# Altium PCB PCB_ledRYG.PcbDoc
Units mm, origin at the board's own origin, x right, y up, seen from the top; angles counter-clockwise.
Board outline 71.12 x 60.96 mm, 2 copper layers (Top Layer, Bottom Layer); 18 components, 12 nets, 36 pads, 0 vias.
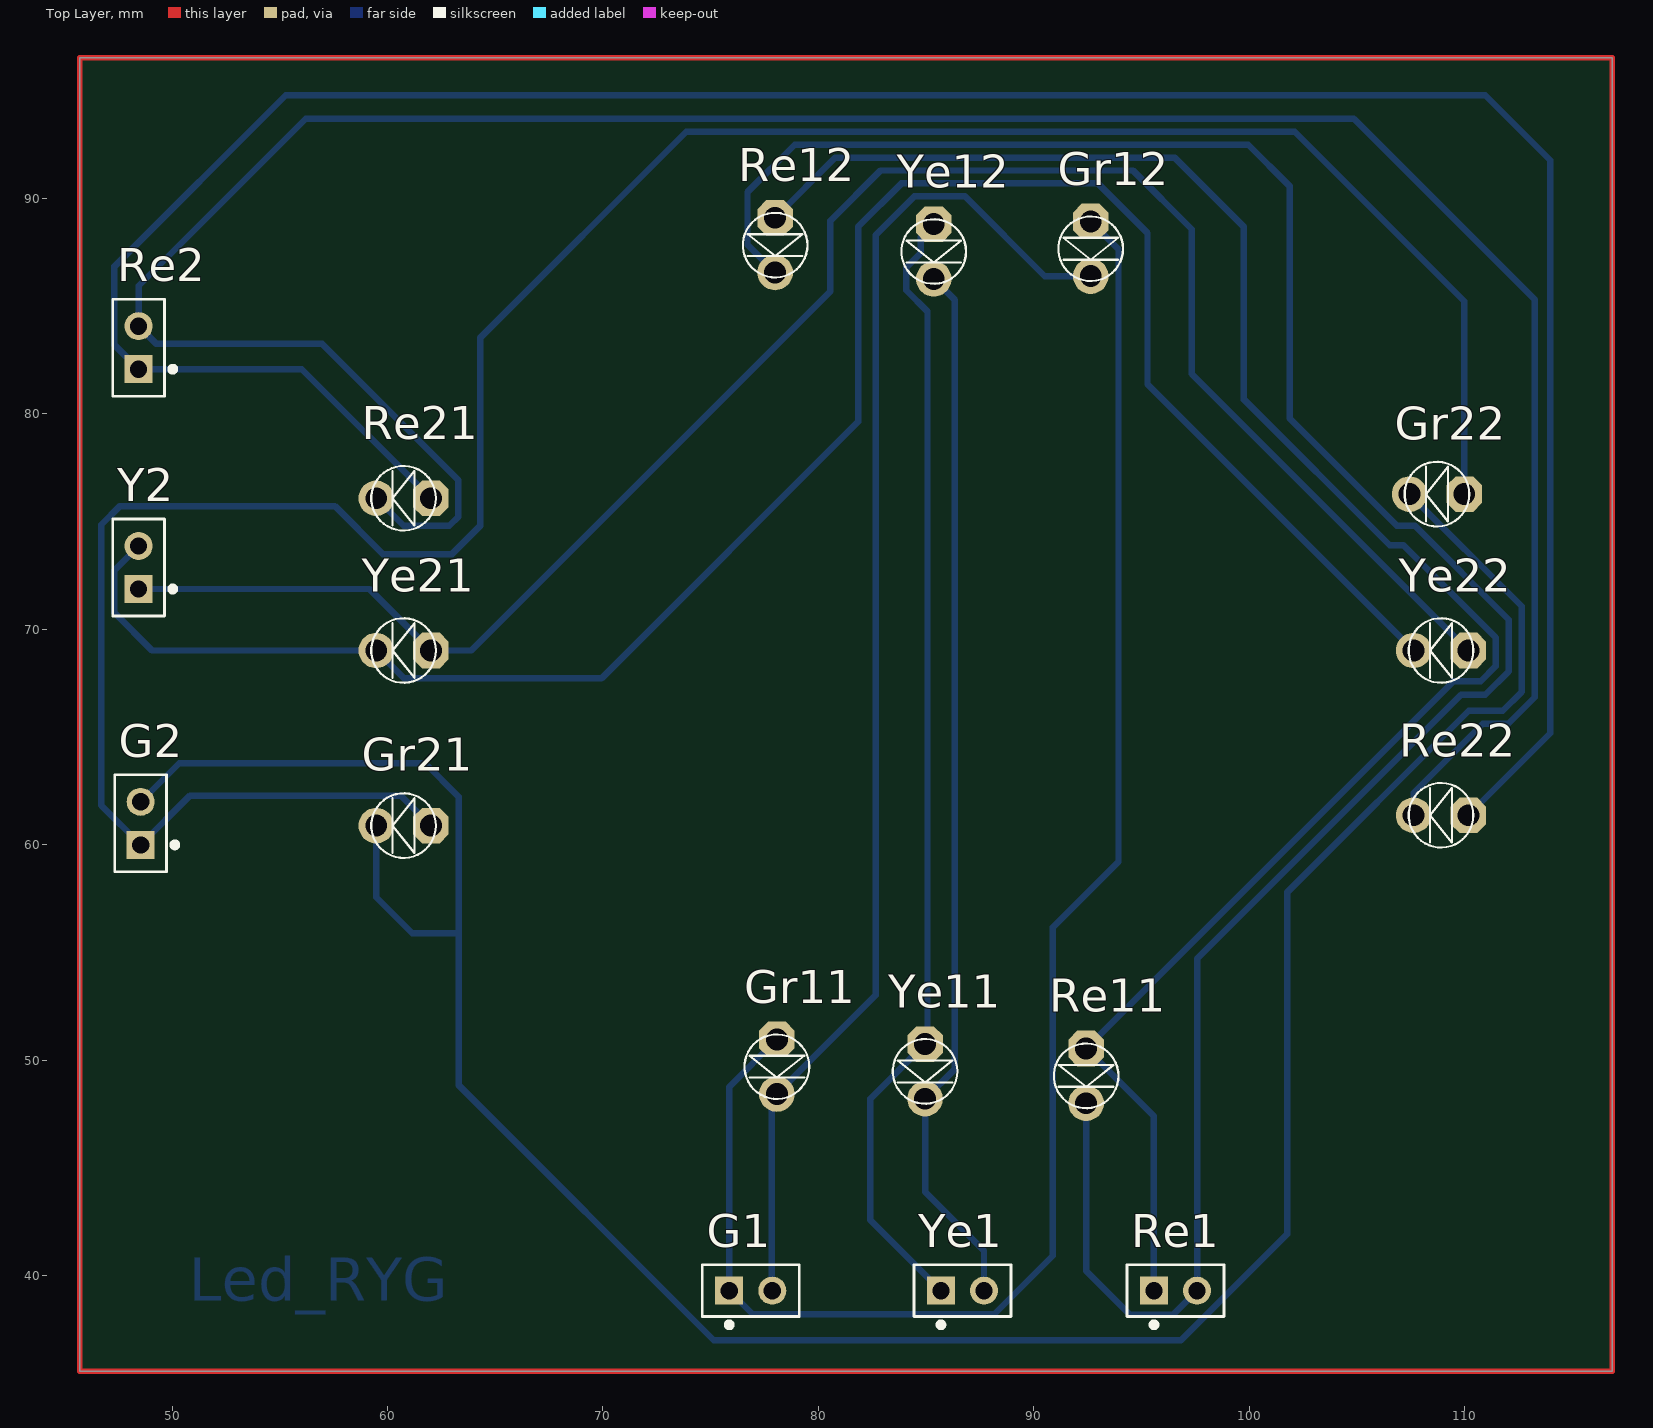
[diagram p0: Top Layer view]
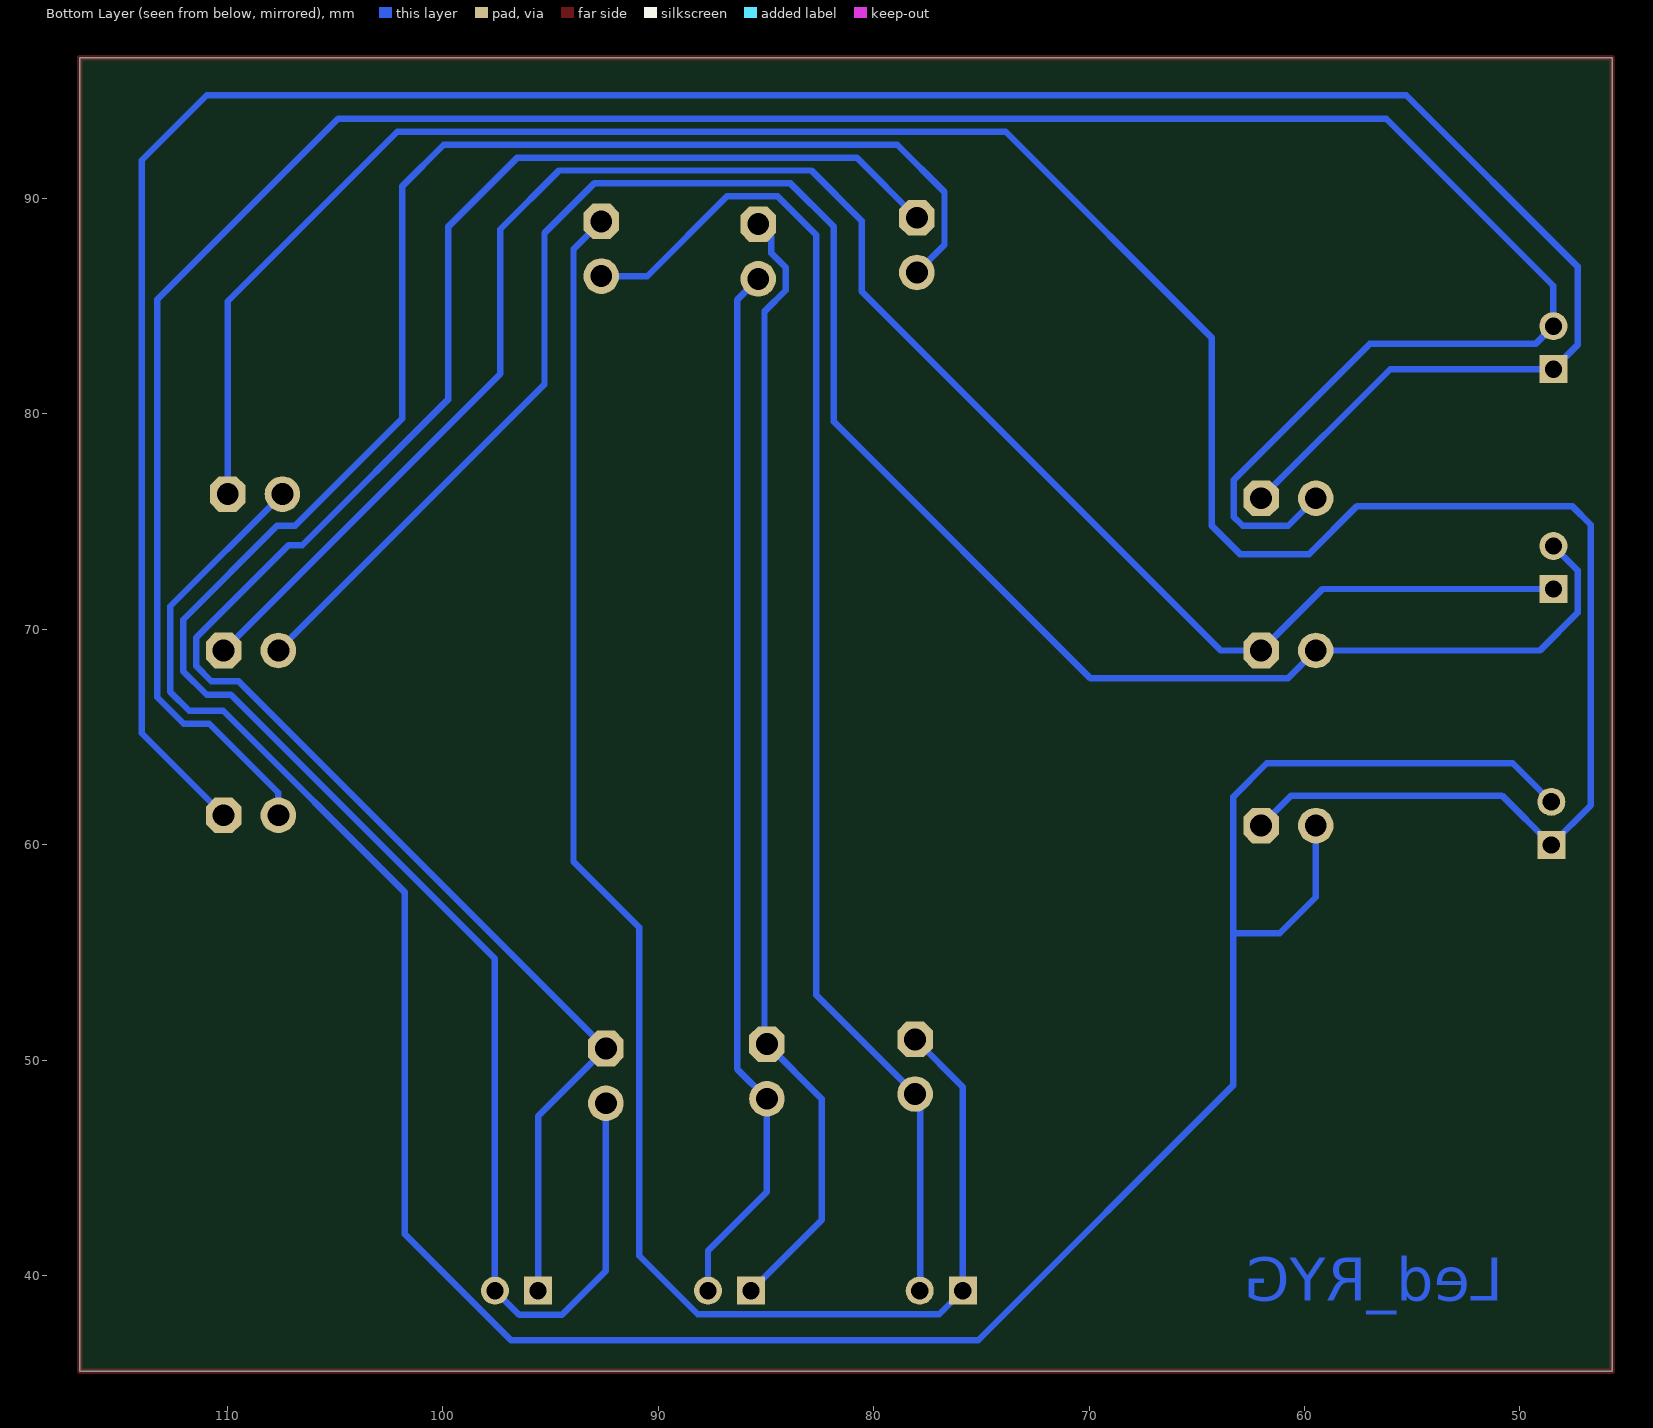
[diagram p1: Bottom Layer view, seen from below]
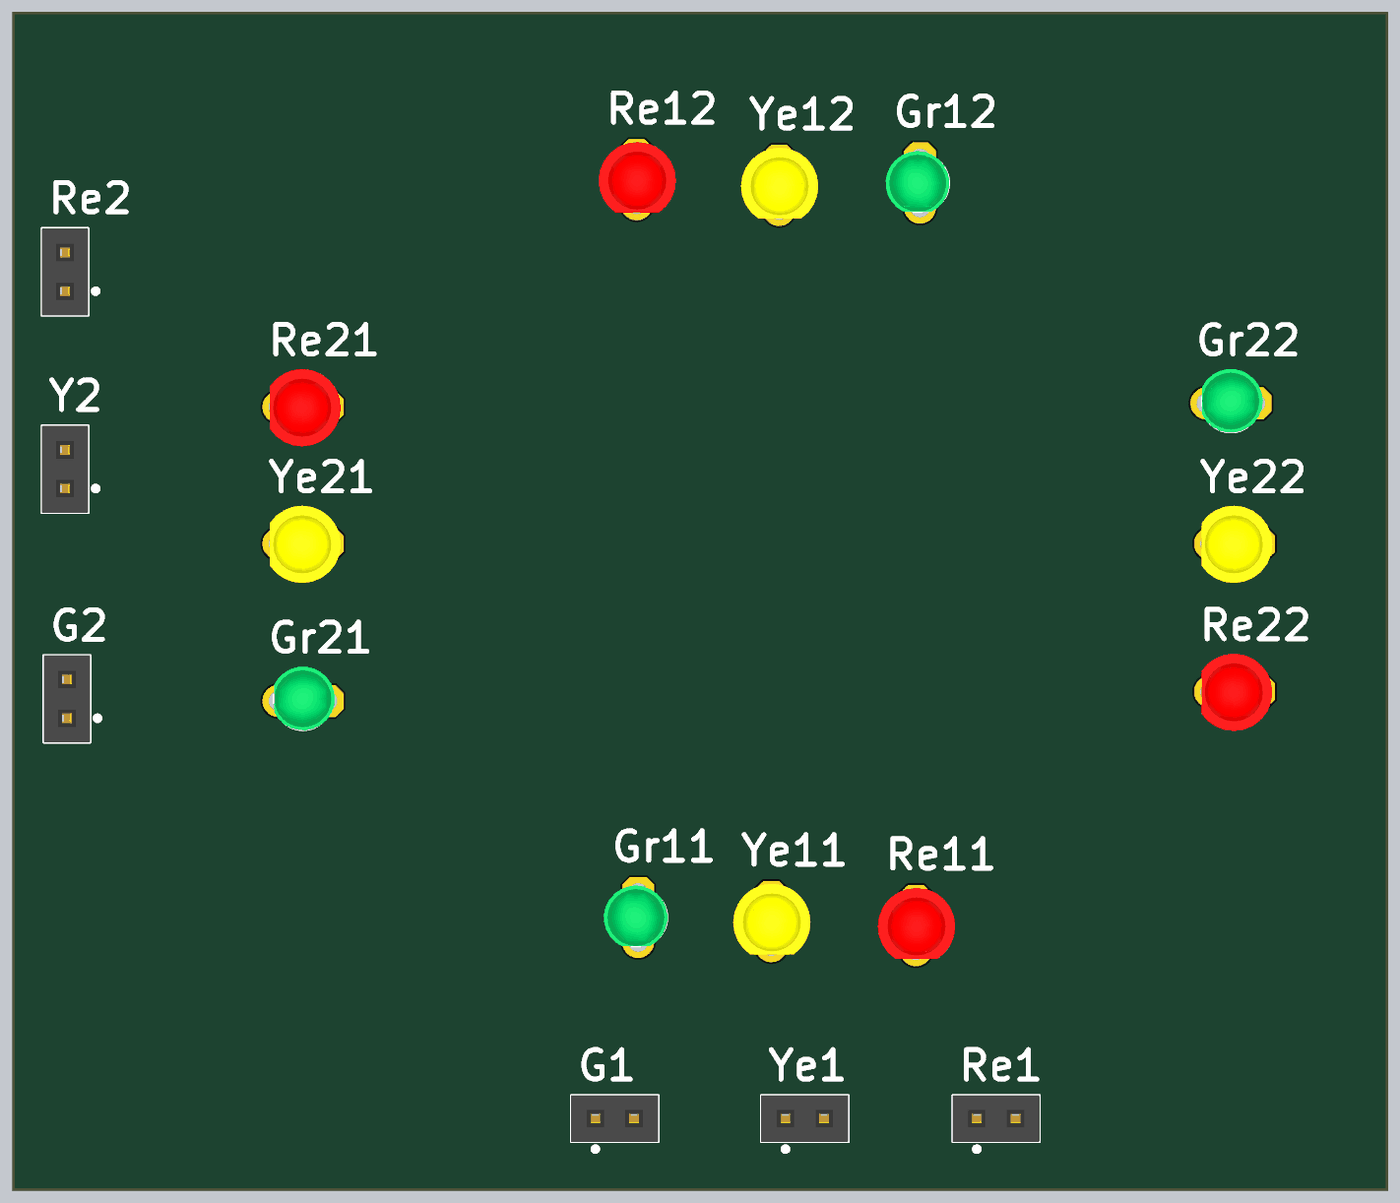
[diagram p2: 3D render of the assembled board from above, using the file's embedded part models]

## Layer stack, top to bottom
Top Solder: solder mask 0.0102, Solder Resist, Dk 3.5
Top Layer: signal copper 0.0356
Dielectric 1: dielectric 0.32, FR-4, Dk 4.8
Bottom Layer: signal copper 0.0356
Bottom Solder: solder mask 0.0102, Solder Resist, Dk 3.5

## Board outline
45.72,35.56 45.72,96.52 116.84,96.52 116.84,35.56

## Design rules (kind name [scope] priority, off if disabled: settings)
Clearance [All] p1: gap=0.3
PolygonConnect [All] p1: connectstyle=Relief reliefconductorwidth=0.254 reliefentries=4 polygonreliefangle="90 Angle" airgapwidth=0.254
RoutingLayers [All] p1: top layer_v5=FALSE bottom layer_v5=TRUE
RoutingVias [All] p1: holewidth=0.711 width=1.27 viastyle="Through Hole" minholewidth=0.711 minwidth=1.27 maxholewidth=0.711 maxwidth=1.27
SolderMaskExpansion [All] p1: expansion=0.102
Width NET [All] p1: maxlimit=0.3 minlimit=0.3 preferedwidth=0.3
29 further rules are at their usual default settings.

## Components (designator, comment, footprint, x,y, rotation, side; value= is the part's Value field where it differs from the comment)
G1 "JP2x1-2.0" J2-C1T 76.858,39.297 r0 top
G2 "JP2x1-2.0" J2-C1T 48.541,60.991 r90 top
Gr11 "LED 3mm" LED-3MM-GREEN 78.07,50.964 r270 top
Gr12 "LED 3mm" LED-3MM-GREEN 92.639,88.931 r270 top
Gr21 "LED 3mm" LED-3MM-GREEN 62.013,60.884 r180 top
Gr22 "LED 3mm" LED-3MM-GREEN 109.98,76.272 r180 top
Re1 "JP2x1-2.0" J2-C1T 96.575,39.297 r0 top
Re2 "JP2x1-2.0" J2-C1T 48.445,83.07 r90 top
Re11 "LED 3mm" LED-3MM-RED 92.428,50.538 r270 top
Re12 "LED 3mm" LED-3MM-RED 77.992,89.099 r270 top
Re21 "LED 3mm" LED-3MM-RED 62.013,76.08 r180 top
Re22 "LED 3mm" LED-3MM-RED 110.17,61.365 r180 top
Y2 "JP2x1-2.0" J2-C1T 48.445,72.868 r90 top
Ye1 "JP2x1-2.0" J2-C1T 86.685,39.297 r0 top
Ye11 "LED 3mm" LED-3MM-YELLOW 84.951,50.746 r270 top
Ye12 "LED 3mm" LED-3MM-YELLOW 85.354,88.804 r270 top
Ye21 "LED 3mm" LED-3MM-YELLOW 62.013,69.014 r180 top
Ye22 "LED 3mm" LED-3MM-YELLOW 110.17,69.014 r180 top

## Footprints (in the part's own frame and the unit in brackets; to place one, negate y for a bottom-side part, rotate by r counter-clockwise, add the part's x,y. Pads: shape width x height; smd on the part's side, far side on the other; paste and mask are expansions set on the pad)
J2-C1T [mm]
  rect 1.3x1.3 hole 0.8: 1(-1,0)
  round 1.3 hole 0.8: 2(1,0)
  silkscreen extent -2.25,-1.71 2.25,1.2, body extent -2.25,-1.2 2.25,1.2, height 4.31
LED-3MM-GREEN [mil]
  oct 65x65 hole 40: 1(0,0)
  round 65 hole 40: 2(100,0)
  silkscreen extent -9,-59 109,59, body extent -15,-70 112,60, height 182
LED-3MM-RED [mil]
  oct 65x65 hole 40: 1(0,0)
  round 65 hole 40: 2(100,0)
  silkscreen extent -9,-59 109,59, body extent -27,-77 117,80, height 181
LED-3MM-YELLOW [mil]
  oct 65x65 hole 40: 1(0,0)
  round 65 hole 40: 2(100,0)
  silkscreen extent -9,-59 109,59, body extent -27,-77 117,80, height 181

## Part data
G1 G2 Re1 Re2 Y2 Ye1: "WR-PHD 2.00 mm Socket Header"
Gr11 Gr12 Gr21 Gr22: library part "LED 3mm Xanh La", "C?m"
Re11 Re12 Re21 Re22: library part "LED 3mm Do", "C?m"
Ye11 Ye12 Ye21 Ye22: library part "LED 3mm Vang", "C?m"

## Nets (pads, with @x,y where several pads share a name; then routed paths per layer and width w, separated by ;. In a path a pad name is that pad's centre, name@x,y a point inside that pad or via, vN(x,y) a via of type N, cw(c..) or ccw(c..) an arc to the next point about the centre after c; other vN are vias at no path point)
NetG1_1: G1.1 Gr11.1 Gr12.1 | length 79
  Bottom Layer w0.3: Gr11.1 75.858,48.752 G1.1 76.958,38.197 88.159,38.197 90.881,40.919 90.881,56.159 93.929,59.207 93.929,87.641 Gr12.1
NetG1_2: G1.2 Gr11.2 Gr12.2 | length 63.3
  Bottom Layer w0.3: G1.2 77.83,39.325 77.83,48.184 Gr11.2 82.652,53.005 82.652,88.29 84.455,90.094 86.804,90.094 90.507,86.391 Gr12.2
NetG2_1: G2.1 Gr21.1 Gr22.1 | length 120.6
  Bottom Layer w0.3: Gr21.1 60.616,62.281 50.831,62.281 G2.1 46.711,61.821 46.711,74.851 47.577,75.717 57.556,75.717 59.782,73.492 62.993,73.492 64.293,74.792 64.293,83.521 73.866,93.094 102.106,93.094 109.98,85.22 Gr22.1
NetG2_2: G2.2 Gr21.2 Gr22.2 | length 124.7
  Bottom Layer w0.3: G2.2 50.329,63.779 61.747,63.779 63.297,62.23 63.297,55.883 ; Gr21.2 59.473,57.561 61.151,55.883 63.297,55.883 ; Gr22.2 112.645,71.067 112.645,67.091 111.771,66.216 110.184,66.216 101.752,57.785 101.752,41.919 96.831,36.997 75.14,36.997 63.297,48.84 63.297,55.883
NetRe1_1: Re1.1 Re11.1 Re12.1 | length 88.8
  Bottom Layer w0.3: Re12.1 80.787,91.894 96.532,91.894 99.75,88.676 99.75,80.664 106.514,73.9 107.159,73.9 111.445,69.613 111.445,68.291 110.739,67.584 109.474,67.584 Re11.1 95.575,47.391 Re1.1
NetRe1_2: Re1.2 Re11.2 Re12.2 | length 108
  Bottom Layer w0.3: Re12.2 76.708,87.843 76.708,90.297 78.905,92.494 99.951,92.494 101.87,90.575 101.87,79.791 106.848,74.813 107.674,74.813 112.045,70.442 112.045,68.042 110.958,66.954 109.83,66.954 97.575,54.7 Re1.2 96.454,38.176 94.463,38.176 92.428,40.211 Re11.2
NetRe2_1: Re2.1 Re21.1 Re22.1 | length 124.5
  Bottom Layer w0.3: Re21.1 56.023,82.07 Re2.1 47.32,83.195 47.32,86.843 55.27,94.793 110.947,94.793 113.975,91.765 113.975,65.17 Re22.1
NetRe2_2: Re2.2 Re21.2 Re22.2 | length 124.3
  Bottom Layer w0.3: Re21.2 60.749,74.805 62.865,74.805 63.289,75.228 63.289,76.919 56.966,83.242 49.273,83.242 Re2.2 48.445,85.941 56.198,93.694 104.858,93.694 113.245,85.306 113.245,66.842 112.019,65.616 110.832,65.616 107.63,62.414 Re22.2
NetY2_1: Y2.1 Ye21.1 Ye22.1 | length 87.2
  Bottom Layer w0.3: Y2.1 59.159,71.868 Ye21.1 63.883,69.014 80.559,85.69 80.559,88.967 82.886,91.294 94.6,91.294 97.333,88.561 97.333,81.851 Ye22.1
NetY2_2: Y2.2 Ye21.2 Ye22.2 | length 93.1
  Bottom Layer w0.3: Y2.2 47.32,72.743 47.32,70.764 49.07,69.014 Ye21.2 60.771,67.716 69.926,67.716 81.839,79.629 81.839,88.678 83.855,90.694 92.974,90.694 95.275,88.392 95.275,81.369 Ye22.2
NetYe1_1: Ye1.1 Ye11.1 Ye12.1 | length 52.9
  Bottom Layer w0.3: Ye12.1 84.742,88.192 84.742,87.456 84.078,86.792 84.078,85.736 85.063,84.751 85.063,50.858 Ye11.1 82.403,48.198 82.403,42.579 Ye1.1
NetYe1_2: Ye1.2 Ye11.2 Ye12.2 | length 49.1
  Bottom Layer w0.3: Ye12.2 86.335,85.283 86.335,49.59 Ye11.2 84.951,43.887 87.685,41.153 Ye1.2
copper on no net: | length 264.2
  Top Layer w0.254: 45.72,35.56 45.72,96.52 116.84,96.52 116.84,35.56 45.72,35.56

## Other copper
Bottom Layer:
  text "Led_RYG" at 50.78,38.836 h2